# Altium PCB A3v4.PcbDoc
Units mm, origin at the board's own origin, x right, y up, seen from the top; angles counter-clockwise.
Board outline 82 x 77 mm, 2 copper layers (Top Layer, Bottom Layer); 17 components, 42 nets, 112 pads, 0 vias.
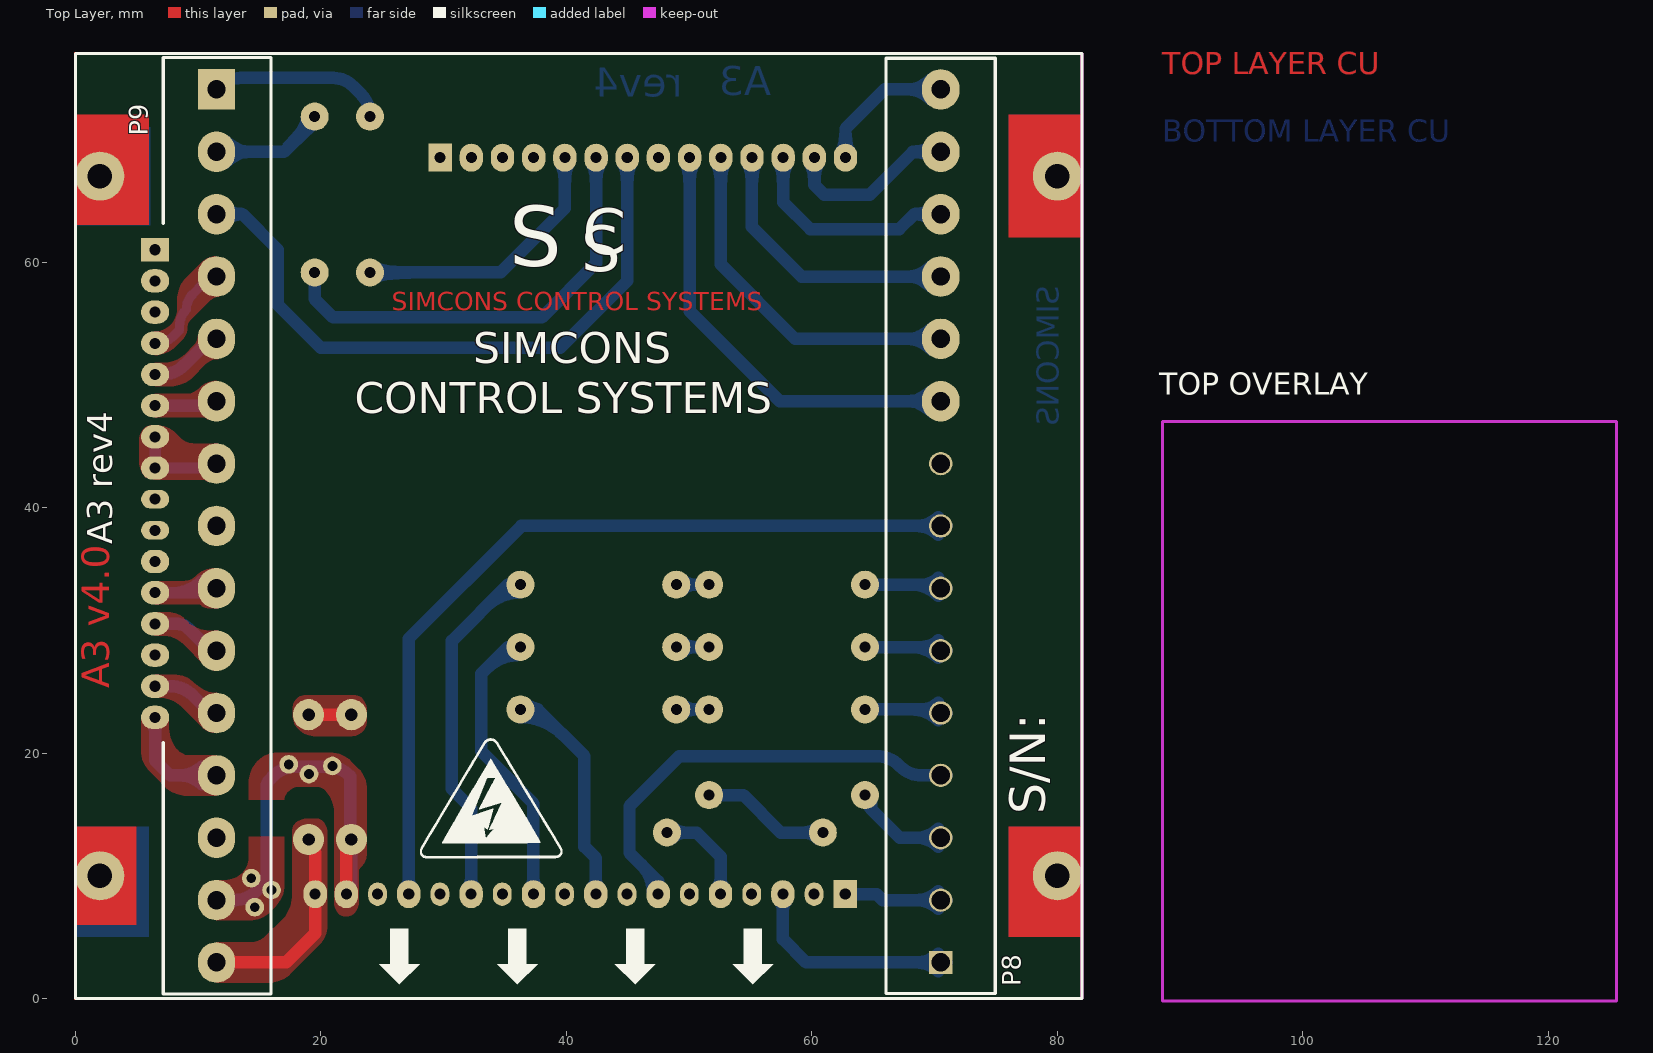
[diagram p0: Top Layer view]
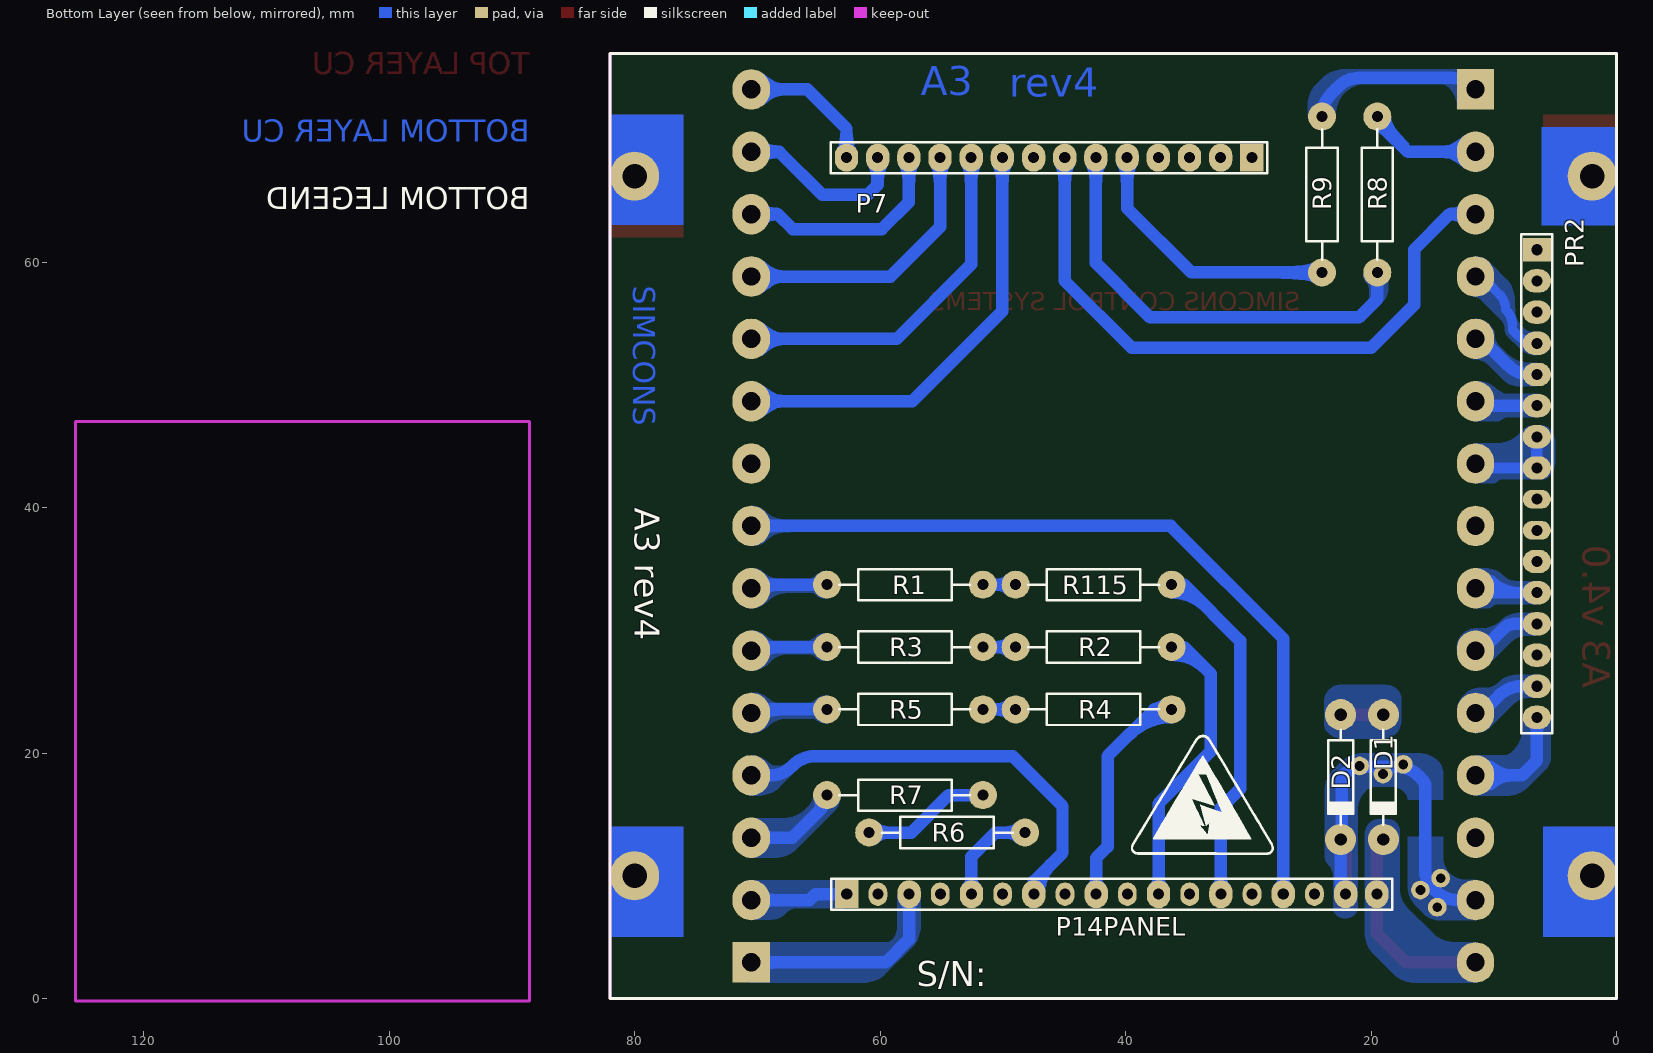
[diagram p1: Bottom Layer view, seen from below]

## Layer stack, top to bottom
Top Solder: solder mask 0.0102, Solder Resist, Dk 3.5
Top Layer: signal copper 0.0356
Dielectric1: dielectric 0.32, FR-4, Dk 4.8
Bottom Layer: signal copper 0.0356
Bottom Solder: solder mask 0.0102, Solder Resist, Dk 3.5

## Board outline
0,0 0,77 82,77 82,0

## Design rules (kind name [scope] priority, off if disabled: settings)
Clearance AC [(InNet('R') OR InNet('Y') OR InNet('B') OR InNet('N') OR InNet('DGB') OR InNet('DGN') OR InNet('DGR') OR InNet('DGY'))] p1: gap=0.635 ignorepadtopadclearanceinfootprint=FALSE except(0: Arc-Hole Track-Hole SMDPad-Hole THPad-Hole Via-Hole Fill-Hole Poly-Hole Region-Hole Text-Hole)
Clearance [All] p2: gap=0.457 ignorepadtopadclearanceinfootprint=FALSE except(0: Arc-Hole Track-Hole SMDPad-Hole THPad-Hole Via-Hole Fill-Hole Poly-Hole Region-Hole Text-Hole)
ComponentClearance [All] p1 off: gap=0.254 collisioncheckmode=3 verticalgap=0.254 showdistances=FALSE
Height [All] p1 off: minheight=0 maxheight=25.4 prefheight=12.7
PolygonConnect [All] p1: connectstyle=Direct reliefconductorwidth=0.254 reliefentries=4 polygonreliefangle="90 Angle" airgapwidth=0.254
RoutingVias [All] p1: holewidth=0.711 width=1.524 viastyle="Through Hole" minholewidth=0.711 minwidth=1.27 maxholewidth=2 maxwidth=3.048
SilkToSolderMaskClearance SilkscreenOverComponentPads [IsPad] p1: minsilkscreentomaskgap=0.254 clearancetoexposedcopper=TRUE
SolderMaskExpansion [All] p1: expansion=0.102
Width [All] p1: maxlimit=1.27 minlimit=0.61 preferedwidth=0.762
27 further rules are at their usual default settings.

## Classes and differential pairs
component class PANEL_A3_v4: D1 P7 P8 P9 P14PANEL PR2 R1 R2 R3 R4 R5 R6 R7 R9 R115

## Components (designator, comment, footprint, x,y, rotation, side; value= is the part's Value field where it differs from the comment)
D1 "P6KE44CA" DIODE1A 19.004,18.042 r270 bottom
D2 "P6KE44CA" DIODE1A 22.484,18.042 r270 bottom
P7 "Header 14" HDR1X14_BURGE_M 29.72,68.5 r0 bottom locked
P8 "XY2500 7PIN+8PIN MALE ST, FEMALE R/A" XY2500_15PIN_M_ST#1 70.5,38.5 r90 top locked
P9 "XY2500 7PIN+8PIN MALE ST, FEMALE R/A" XY2500_15PIN_M_ST#2 11.5,38.5 r270 top locked
P14PANEL "Header 18" HDR1X18_BURGE_M 62.72,8.5 r180 bottom locked
PR2 "Header 16" HDR1X16_BURGE_F 6.5,61 r270 bottom
R1 "MFR 1M .5W" AXIAL-0.5 57.98,33.715 r0 bottom value=100K
R2 "MFR 1M .5W" AXIAL-0.5 42.605,28.635 r0 bottom value=100K
R3 "MFR 1M .5W" AXIAL-0.5 57.98,28.635 r0 bottom value=100K
R4 "MFR 1M .5W" AXIAL-0.5 42.605,23.555 r0 bottom value=100K
R5 "MFR 1M .5W" AXIAL-0.5 57.98,23.555 r0 bottom value=100K
R6 "MFR 1M .5W" AXIAL-0.5 54.543,13.522 r0 bottom value=100K
R7 "MFR 1M .5W" AXIAL-0.5 57.98,16.57 r0 bottom value=100K
R8 "MFR 1M .5W" AXIAL-0.5 19.5,65.5 r90 bottom value=100K
R9 "MFR 1M .5W" AXIAL-0.5 24,65.5 r90 bottom value=100K
R115 "MFR 1M .5W" AXIAL-0.5 42.605,33.715 r0 bottom value=100K

## Footprints (in the part's own frame and the unit in brackets; to place one, negate y for a bottom-side part, rotate by r counter-clockwise, add the part's x,y. Pads: shape width x height; smd on the part's side, far side on the other; paste and mask are expansions set on the pad)
AXIAL-0.5 [mil] "Axial Device, Thru-Hole; 2 Leads; 0.5 in Pin Spacing"
  round 90 hole 35.43: 1(-250,0) 2(250,0)
  silkscreen extent -210,-50 210,50, body extent -270,-51 270,51, height 106
DIODE1A [mm] "DIODE 1 AMPERE"
  round 2.54 hole 1: 1(-5.08,0) 2(5.08,0)
  silkscreen extent -3.87,-1.02 3.87,1.02, body extent -5.51,-1.36 5.51,1.36, height 2.72
HDR1X14_BURGE_M [mm] "Connector; Header; 14 Position"
  rect 1.905x2.286 hole 0.9: 1(0,0)
  oval 1.905x2.286 hole 0.9: 2(2.54,0) 3(5.08,0) 4(7.62,0) 5(10.16,0) 6(12.7,0) 7(15.24,0) 8(17.78,0) 9(20.32,0) 10(22.86,0) 11(25.4,0) 12(27.94,0) 13(30.48,0) 14(33.02,0)
  silkscreen extent -1.27,-1.27 34.29,1.27, body extent -1.27,-10.04 34.29,0.32, height 2.56
HDR1X16_BURGE_F [mil] "Connector; Header; 16 Position"
  rect 75x90 hole 35.43: 1(0,0)
  oval 75x90 hole 35.43: 2(100,0) 3(200,0) 4(300,0) 5(400,0) 6(500,0) 7(600,0) 8(700,0) 11(1000,0) 12(1100,0) 13(1200,0) 14(1300,0) 15(1400,0) 16(1500,0)
  oval 60x90 hole 35.43: 9(800,0) 10(900,0)
  silkscreen extent -50,-50 1550,50, body extent -50,-50 1550,50, height 237
HDR1X18_BURGE_M [mm] "Connector; Header; 18 Position"
  rect 1.905x2.286 hole 0.9: 1(0,0)
  oval 1.524x1.905 hole 0.9: 2(2.54,0) 4(7.62,0) 6(12.7,0) 8(17.78,0) 10(22.86,0) 12(27.94,0) 14(33.02,0) 16(38.1,0)
  oval 1.905x2.286 hole 0.9: 3(5.08,0) 5(10.16,0) 7(15.24,0) 9(20.32,0) 11(25.4,0) 13(30.48,0) 15(35.56,0) 17(40.64,0) 18(43.18,0)
  silkscreen extent -1.27,-1.27 44.45,1.27, body extent -1.27,-10.04 44.45,0.32, height 2.54
XY2500_15PIN_M_ST#1 [mm]
  rect 1.905x1.905 / inner rect 3.302x3.048 / far side rect 3.302x3.048 hole 1.5: 1(-35.56,0)
  round 1.905 / inner oval 3.302x3.048 / far side oval 3.302x3.048 hole 1.5: 2(-30.48,0) 3(-25.4,0) 4(-20.32,0) 5(-15.24,0) 6(-10.16,0) 7(-5.08,0) 8(0,0) 9(5.08,0)
  oval 3.302x3.048 hole 1.5: 10(10.16,0) 11(15.24,0) 12(20.32,0) 13(25.4,0) 14(30.48,0) 15(35.56,0)
  silkscreen extent -38.1,-4.45 38.1,4.45, body extent -38.06,-4.24 38.06,4.24, height 12.08
XY2500_15PIN_M_ST#2 [mm]
  rect 3.302x3.048 hole 1.5: 1(-35.56,0)
  oval 3.302x3.048 hole 1.5: 2(-30.48,0) 3(-25.4,0) 4(-20.32,0) 5(-15.24,0) 6(-10.16,0) 7(-5.08,0) 8(0,0) 9(5.08,0) 10(10.16,0) 11(15.24,0) 12(20.32,0) 13(25.4,0) 14(30.48,0) 15(35.56,0)
  silkscreen extent -38.17,-4.34 38.14,4.45, body extent -38.06,-4.24 38.06,4.24, height 12.08

## Part data
D1 D2: library part "Diode 1N5408", "3 Amp Medium Power Silicon Rectifier Diode", ComponentLink1Description="Manufacturer Link", ComponentLink1URL=http://www.irf.com/, DatasheetVersion=Aug-1984, LatestRevisionDate=17-Jul-2002, LatestRevisionNote="Re-released for DXP Platform.", PackageDescription="Diode, Axial; Body 9.5 x 5.3 mm (LxDia. max), Lead Dia. 1.32 mm (max)", PackageReference=DO-201AD, Published=8-Jun-2000, Publisher="Altium Limited"
P7: "Header, 14-Pin", LatestRevisionDate=17-Jul-2002, LatestRevisionNote="Re-released for DXP Platform.", Publisher="Altium Limited"
P8 P9: library part "Header 15", "Header, 15-Pin", LatestRevisionDate=17-Jul-2002, LatestRevisionNote="Re-released for DXP Platform.", Publisher="Altium Limited"
P14PANEL: "Header, 18-Pin", LatestRevisionDate=17-Jul-2002, LatestRevisionNote="Re-released for DXP Platform.", Publisher="Altium Limited"
PR2: "Header, 16-Pin", LatestRevisionDate=17-Jul-2002, LatestRevisionNote="Re-released for DXP Platform.", Publisher="Altium Limited"
R1 R2 R3 R4 R5 R6 R7 R8 R9 R115: library part "Res Semi", "Semiconductor Resistor", LatestRevisionDate=17-Jul-2002, LatestRevisionNote="Re-released for DXP Platform.", PackageDescription="Axial Device, Thru-Hole; 2 Leads; 0.5 in Pin Spacing", PackageReference=AXIAL-0.5, Published=8-Jun-2000, Publisher="Altium Limited"

## Free pads (board coordinates)
  round 4 hole 2: 0(2,10) 1(80,10) 2(80,67) 3(2,67)
  round 1.524 hole 0.8: 4(14.334,9.804) 5(14.613,7.442) 6(15.985,8.839) 7(17.382,19.075) 8(19.033,18.288) 9(20.938,18.948)

## Nets (pads, with @x,y where several pads share a name; then routed paths per layer and width w, separated by ;. In a path a pad name is that pad's centre, name@x,y a point inside that pad or via, vN(x,y) a via of type N, cw(c..) or ccw(c..) an arc to the next point about the centre after c; other vN are vias at no path point)
B: P8.5 R5.2 | length 10.1
  Bottom Layer w1.016: R5.2@64.83,23.555 70.705,23.555 P8.5@71,23.26 ; 68.142,23.555 cw(c68.142,20.529) P8.5@70.282,22.669 ; 68.953,23.555 ccw(c68.953,25.434) P8.5@70.282,24.105
B_M: P14PANEL.9 R4.1 | length 28
  Bottom Layer w1.016: R4.1@36.255,22.92 cw(c36.255,18.014) 39.724,21.483 ; R4.1 37.652,23.555 ; R4.1@36.255,23.936 cw(c36.255,21.483) 37.989,23.218 ; R4.1@36.733,23.137 cw(c37.652,22.336) 37.652,23.555 ; R4.1@36.733,23.973 ccw(c37.652,24.774) 37.652,23.555 ; P14PANEL.9@42.086,9.005 ccw(c41.327,9.764) 42.4,9.764 ccw(c43.473,9.764) P14PANEL.9@42.714,9.005 ; P14PANEL.9 42.4,11.441 41.462,12.379 41.462,19.745 37.652,23.555
BAT+: D2.2 P9.14 P14PANEL.17 pad.4 pad.5 pad.6 pad.7 pad.8 pad.9 | length 34.3
  Top Layer w1.016: P14PANEL.17 22.08,11.987 cw(c23.459,11.987) D2.2
  Bottom Layer w1.016: P9.14 12.968,8.02 ccw(c12.968,10.56) 14.764,8.764 14.964,8.964 ccw(c13.427,10.5) 15.6,10.5 15.6,17.317 cw(c16.283,17.317) 15.8,17.8 16.156,18.156 cw(c17.952,16.36) 17.952,18.9 20.548,18.9 cw(c20.548,16.36) 22.344,18.156 22.4,18.1 22.4,13.165 ccw(c22.686,13.165) D2.2 22.484,9.475 cw(c21.105,9.475) P14PANEL.17@22.081,8.501
BTS+: P9.1 R9.2 | length 14.5
  Bottom Layer w1.016: P9.1 11.696,74.256 cw(c13.492,72.46) 13.492,75 21,75 cw(c21,72.712) 22.618,74.33 23.256,73.692 cw(c21.46,71.896) 24,71.896 R9.2
BTS+_R: P7.5 R9.1 | length 22.2
  Bottom Layer w1.016: R9.1 34.65,59.15 39.88,64.38 P7.5
BTS-: P9.2 R8.2 | length 9.2
  Bottom Layer w1.016: P9.2 16.98,68.98 19,71 R8.2@19,71.85
BTS-_R: P7.6 R8.1 | length 35.6
  Bottom Layer w1.016: R8.1@19.5,58.65 19.5,57 21,55.5 38,55.5 42.42,59.92 P7.6
CONT_S_IN: P7.7 P9.3 | length 52.9
  Bottom Layer w1.016: P9.3 13.6,63.9 16.5,61 16.5,56.5 20,53 39.5,53 44.96,58.46 P7.7
DGB: P8.1 P14PANEL.3 | length 23.3
  Bottom Layer w1.016: P14PANEL.3@57.326,7.995 cw(c56.567,7.236) 57.64,7.236 cw(c58.713,7.236) P14PANEL.3@57.954,7.995 ; P14PANEL.3 57.64,4.837 59.537,2.94 P8.1 P8.1@71,2.94 ; P8.1@70.282,2.222 ccw(c68.547,0.487) 68.547,2.94 ccw(c68.547,5.393) P8.1@70.282,3.658
DGN: P8.4 P14PANEL.7 | length 38.6
  Bottom Layer w1.016: 46.123,10.893 cw(c43.921,8.691) P14PANEL.7@47.035,8.691 ; P14PANEL.7 47.48,9.536 45.145,11.871 45.145,15.681 49.209,19.745 65.291,19.745 cw(c65.291,17.205) 67.088,19.001 67.165,18.924 ccw(c68.961,20.72) 68.961,18.18 P8.4 P8.4@71,18.18
DGR: P8.3 R7.2 | length 13.6
  Bottom Layer w1.016: R7.2@64.449,16.57 ccw(c66.289,16.57) 64.988,15.269 ; R7.2@64.83,16.57 64.83,15.427 67.157,13.1 P8.3 P8.3@71,13.1 ; P8.3@70.282,12.382 ccw(c68.547,10.647) 68.547,13.1 ccw(c68.547,15.553) P8.3@70.282,13.818
DGR_M: P14PANEL.5 R6.1 | length 12.3
  Bottom Layer w1.016: R6.1 50.606,13.522 52.56,11.568 P14PANEL.5 ; R6.1@48.642,13.073 cw(c49.726,11.989) 49.726,13.522 cw(c49.726,15.055) R6.1@48.642,13.971 ; P14PANEL.5@52.246,9.005 ccw(c51.487,9.764) 52.56,9.764 ccw(c53.633,9.764) P14PANEL.5@52.874,9.005
DGY: P8.2 P14PANEL.1 | length 14
  Bottom Layer w1.016: P14PANEL.1 65.28,8.5 65.76,8.02 P8.2 P8.2@71,8.02 ; P14PANEL.1@63.034,8.186 cw(c63.793,7.427) 63.793,8.5 cw(c63.793,9.573) P14PANEL.1@63.034,8.814 ; P8.2@70.282,7.302 ccw(c68.547,5.567) 68.547,8.02 ccw(c68.547,10.473) P8.2@70.282,8.738
DIGITALIN: P9.7 PR2.7 PR2.8 | length 9.5
  Bottom Layer w0.914: PR2.7@6.15,45.41 cw(c5.304,44.564) 6.5,44.564 cw(c7.696,44.564) PR2.7@6.85,45.41 ; PR2.7 PR2.8 10.631,43.22 ccw(c10.631,44.449) 10.64,43.22 ccw(c10.631,44.449) P9.7
EMSTP: P7.11 P8.12 | length 23.2
  Bottom Layer w1.016: P7.11 55.12,62.856 59.156,58.82 P8.12 P8.12@71,58.82
FLGIN: P7.4
FLIN: P7.8 | length 0.3
  Bottom Layer w1.016: P7.8@47.304,68.304 P7.8
GCONTACTIN: P9.10 PR2.13 | length 5.9
  Bottom Layer w1.016: PR2.13 8.335,30.52 cw(c8.335,29.349) 9.163,30.177 11,28.34 P9.10
GCONTACTOUT: P9.9 PR2.12 | length 9.6
  Bottom Layer w0.914: PR2.12 10.64,33.06 ccw(c10.64,34.267) 11.494,33.414 P9.9 ; PR2.12@7.041,32.71 cw(c7.886,31.864) 7.886,33.06 cw(c7.886,34.256) PR2.12@7.041,33.41 ; 7.862,33.06 ccw(c7.862,36.431) P9.9@10.246,34.047
GND: D1.2 P9.15 P14PANEL.18 | length 16.8
  Top Layer w1.016: P9.15 17.172,2.94 19.54,5.308 P14PANEL.18 19.54,11.668 ccw(c17.71,11.668) D1.2
LLOP: P7.12 P8.13 | length 18.4
  Bottom Layer w1.016: P7.12 57.66,64.888 59.877,62.671 67.116,62.671 68.345,63.9 P8.13 P8.13@71,63.9
LOPIN: P7.9 P8.10 | length 36.5
  Bottom Layer w1.016: P7.9 50.04,55.998 57.378,48.66 P8.10 P8.10@71,48.66
MCONTACTIN: P9.12 PR2.16 | length 14
  Bottom Layer w1.016: PR2.16@6.186,22.586 cw(c5.427,21.827) 6.5,21.827 cw(c7.573,21.827) PR2.16@6.814,22.586 ; PR2.16 6.5,19.401 7.721,18.18 P9.12@11,18.18 ; P9.12@10.282,17.462 ccw(c8.547,15.727) 8.547,18.18 ccw(c8.547,20.633) P9.12@10.282,18.898
MCONTACTOUT: P9.11 PR2.15 | length 5.8
  Bottom Layer w1.016: PR2.15 7.768,25.44 cw(c7.768,22.9) 9.564,24.696 11,23.26 P9.11
N: P8.8 P14PANEL.15 | length 74
  Bottom Layer w1.016: P14PANEL.15@26.846,9.005 ccw(c26.087,9.764) 27.16,9.764 ccw(c28.233,9.764) P14PANEL.15@27.474,9.005 ; P14PANEL.15 27.16,29.319 36.341,38.5 P8.8 P8.8@71,38.5 ; P8.8@70.282,37.782 ccw(c68.547,36.047) 68.547,38.5 ccw(c68.547,40.953) P8.8@70.282,39.218
NetD1_1: D1.1 D2.1 | length 3.5
  Top Layer w1.016: D1.1 D2.1
NetR1_1: R1.1 R115.2 | length 8
  Bottom Layer w1.016: R115.2 R1.1 R1.1@52.13,33.715 ; R115.2@49.404,33.266 cw(c50.488,32.182) 50.488,33.715 cw(c50.488,35.248) R115.2@49.404,34.164 ; R1.1@51.681,33.266 ccw(c50.597,32.182) 50.597,33.715 ccw(c50.597,35.248) R1.1@51.681,34.164
NetR2_2: R2.2 R3.1 | length 8
  Bottom Layer w1.016: R2.2 R3.1 R3.1@52.13,28.635 ; R2.2@49.404,28.186 cw(c50.488,27.102) 50.488,28.635 cw(c50.488,30.168) R2.2@49.404,29.084 ; R3.1@51.681,28.186 ccw(c50.597,27.102) 50.597,28.635 ccw(c50.597,30.168) R3.1@51.681,29.084
NetR4_2: R4.2 R5.1 | length 8
  Bottom Layer w1.016: R4.2 R5.1 R5.1@52.13,23.555 ; R4.2@49.404,23.106 cw(c50.488,22.022) 50.488,23.555 cw(c50.488,25.088) R4.2@49.404,24.004 ; R5.1@51.681,23.106 ccw(c50.597,22.022) 50.597,23.555 ccw(c50.597,25.088) R5.1@51.681,24.004
NetR6_2: R6.2 R7.1 | length 12.4
  Bottom Layer w1.016: R7.1@52.13,16.57 54.416,16.57 57.464,13.522 R6.2 ; R6.2@60.444,13.073 ccw(c59.36,11.989) 59.36,13.522 ccw(c59.36,15.055) R6.2@60.444,13.971
OILTEMP: P7.14 P8.15 | length 12
  Bottom Layer w1.016: P7.14 62.74,70.868 65.932,74.06 P8.15 P8.15@71,74.06
R: P8.7 R1.2 | length 10.1
  Bottom Layer w1.016: R1.2@64.83,33.715 70.705,33.715 P8.7@71,33.42 ; 68.142,33.715 cw(c68.142,30.689) P8.7@70.282,32.829 ; 68.953,33.715 ccw(c68.953,35.594) P8.7@70.282,34.265
R1IN: P7.3
R_M: P14PANEL.13 R115.1 | length 33.6
  Bottom Layer w1.016: P14PANEL.13@31.926,9.005 ccw(c31.167,9.764) 32.24,9.764 ccw(c33.313,9.764) P14PANEL.13@32.554,9.005 ; P14PANEL.13 32.24,15.505 30.667,17.078 30.667,29.143 35.239,33.715 R115.1 ; 33.437,31.913 cw(c36.255,29.094) R115.1@36.255,33.08
RL_HOOTER: P9.4 PR2.4 | length 8
  Bottom Layer w0.762: PR2.4 ccw(c6.5,55.567) 8.046,54.02 ; 8.047,54.021 8.481,54.455 8.481,54.779 cw(c10.397,54.779) 9.042,56.134 cw(c10.801,56.134) 9.557,57.377 10.342,58.162 ccw(c10.342,59.369) 11.195,58.515 P9.4
RL_START: P9.6 PR2.6 | length 4.6
  Bottom Layer w1.016: PR2.6 10.131,48.3 ccw(c10.131,49.529) P9.6@11,48.66
RL_STOP: P9.5 PR2.5 | length 6.1
  Bottom Layer w1.016: PR2.5 7.048,50.84 ccw(c7.048,53.38) 8.844,51.584 11,53.74 P9.5
TIOUT: P7.2
WATERTEMP: P7.13 P8.14 | length 14.8
  Bottom Layer w1.016: P7.13 60.2,66.285 61.02,65.465 64.703,65.465 68.218,68.98 P8.14 P8.14@71,68.98
WTANIN: P7.10 P8.11 | length 29.6
  Bottom Layer w1.016: P7.10 52.58,59.808 58.648,53.74 P8.11 P8.11@71,53.74
Y: P8.6 R3.2 | length 10.1
  Bottom Layer w1.016: R3.2@64.83,28.635 70.705,28.635 P8.6@71,28.34 ; 68.142,28.635 cw(c68.142,25.609) P8.6@70.282,27.749 ; 68.953,28.635 ccw(c68.953,30.514) P8.6@70.282,29.185
Y_M: P14PANEL.11 R2.1 | length 28.6
  Bottom Layer w1.016: 33.437,26.833 cw(c36.255,24.014) R2.1@36.255,28 ; R2.1 35.239,28.635 33.08,26.476 33.08,20.126 37.32,15.886 P14PANEL.11 ; P14PANEL.11@37.006,9.005 ccw(c36.247,9.764) 37.32,9.764 ccw(c38.393,9.764) P14PANEL.11@37.634,9.005
pads on no net: P7.1 P8.9 P9.8 P9.13 P14PANEL.2 P14PANEL.4 P14PANEL.6 P14PANEL.8 P14PANEL.10 P14PANEL.12 P14PANEL.14 P14PANEL.16 PR2.1 PR2.2 PR2.3 PR2.9 PR2.10 PR2.11 PR2.14
copper on no net: | length 636
  Top Layer w0.203: 0,0 0,77 82,77 82,0 0,0
  Bottom Layer w0.203: 0,0 0,77 82,77 82,0 0,0

## Polygon pours and split planes (outlines as drawn)
BTS-_R on Bottom Layer "NONET_L-01_P-001" (solid, pour order 142): 19.304,56.515 19.031,56.788 cw(c20.029,57.785) 18.618,57.785 18.618,58.255 ccw(c18.098,58.255) 18.466,58.623 18.466,58.962 cw(c18.813,58.962) 18.567,59.207 ccw(c18.874,59.514) 18.874,59.08 20.625,59.08 20.625,58.881 cw(c19.758,58.881) 20.371,58.268 ccw(c20.923,57.716) 20.142,57.716 20.142,57.228 ccw(c20.576,57.228) 20.269,56.921 ccw(c20.269,56.626) 20.061,56.835 19.863,56.637
BTS+ on Bottom Layer "NONET_L-01_P-001" (solid, pour order 140): 11.43,75.692 22.214,75.692 cw(c22.214,73.152) 24.01,74.948 24.46,74.498 cw(c22.805,72.843) 25.146,72.843 25.146,71.78 22.947,71.78 cw(c22.947,71.867) 22.885,71.806 22.885,71.998 ccw(c20.345,71.998) 22.141,73.794 ccw(c20.442,72.095) 20.442,74.498 14.447,74.498 ccw(c14.447,73.284) 13.589,74.143 ccw(c14.938,72.794) 13.03,72.794 13.03,72.517 12.192,72.517
BAT+ on Bottom Layer "NONET_L-01_P-001" (solid, pour order 72): 11.489,9.677 12.237,9.677 ccw(c12.237,11.672) 13.648,10.262 ccw(c12.483,11.427) 14.13,11.427 14.13,13.183 17.026,13.183 17.026,9.256 cw(c14.486,9.256) 16.282,7.46 15.68,6.858 cw(c14.515,8.023) 14.515,6.375 11.387,6.375
BAT+ on Bottom Layer "NONET_L-01_P-001" (solid, pour order 76): 14.13,16.182 14.133,16.185 cw(c17.871,16.185) 17.273,16.783 17.305,16.815 cw(c18.409,15.711) 18.409,17.272 19.571,17.272 cw(c19.571,16.058) 20.43,16.916 20.448,16.898 cw(c18.897,15.348) 21.09,15.348 21.09,7.482 ccw(c22.044,7.482) 21.369,6.807 ccw(c21.983,7.42) 21.983,6.553 22.208,6.553 ccw(c22.208,7.473) 22.858,6.823 22.893,6.858 ccw(c22.464,7.287) 23.071,7.287 23.071,9.89 cw(c24.459,9.89) 23.478,10.871 ccw(c22.742,11.607) 23.782,11.607 23.782,16.88 ccw(c21.242,16.88) 23.038,18.676 22.469,19.246 ccw(c20.673,17.45) 20.673,19.99 16.095,19.99 ccw(c16.095,17.822) 14.562,19.355 ccw(c15.605,18.312) 14.13,18.312
NetD1_1 on Bottom Layer "NONET_L-01_P-001" (solid, pour order 78): 22.327,21.184 ccw(c22.327,22.918) 23.554,21.692 ccw(c22.879,22.366) 23.833,22.366 23.833,24.154 ccw(c22.359,24.154) 23.401,25.197 ccw(c22.482,24.277) 22.482,25.578 18.917,25.578 ccw(c18.917,24.017) 17.813,25.121 ccw(c18.427,24.507) 17.559,24.507 17.559,22.632 ccw(c19.034,22.632) 17.991,21.59 ccw(c18.972,22.571) 18.972,21.184
GND on Bottom Layer "NONET_L-01_P-001" (solid, pour order 80): 11.387,1.27 16.406,1.27 ccw(c16.406,3.81) 18.202,2.014 19.762,3.574 ccw(c17.966,5.37) 20.506,5.37 20.506,13.406 ccw(c19.205,13.406) 20.125,14.326 ccw(c19.45,13.651) 19.45,14.605 18.543,14.605 ccw(c18.543,13.825) 17.991,14.376 ccw(c18.727,13.641) 17.686,13.641 17.686,8.924 cw(c15.518,8.924) 17.051,7.391 15.001,5.341 cw(c13.205,7.137) 13.205,4.597 11.489,4.597 11.015,4.124 cw(c10.625,4.514) 10.625,3.962
N on Bottom Layer "NONET_L-01_P-001" (solid, pour order 90): 70.518,40.132 70.382,40.132 ccw(c70.382,38.744) 69.401,39.726 cw(c67.684,41.443) 67.684,39.014 67.343,39.014 67.343,37.973 67.726,37.973 cw(c67.726,35.892) 69.198,37.363 ccw(c70.363,38.529) 70.363,36.881 70.645,36.881
R on Bottom Layer "NONET_L-01_P-001" (solid, pour order 92): 64.295,34.849 64.341,34.849 cw(c64.341,33.548) 65.261,34.468 ccw(c65.874,35.081) 65.874,34.214 68.24,34.214 ccw(c68.24,36.035) 69.528,34.747 cw(c70.264,34.011) 70.264,35.052 70.569,35.052 cw(c70.508,34.991) 70.595,34.991 70.595,31.801 70.378,31.801 cw(c70.378,33.362) 69.274,32.258 69.205,32.327 ccw(c67.47,30.593) 67.47,33.045 65.603,33.045 ccw(c65.603,32.525) 65.235,32.893 cw(c64.499,33.629) 64.499,32.588 64.372,32.588
Y on Bottom Layer "NONET_L-01_P-001" (solid, pour order 94): 70.544,29.997 70.449,29.997 ccw(c70.449,28.263) 69.223,29.489 cw(c68.426,30.287) 68.426,29.159 66.058,29.159 cw(c66.058,30.287) 65.261,29.489 ccw(c64.586,28.815) 64.586,29.769 64.27,29.769 64.27,27.57 ccw(c64.357,27.57) 64.295,27.508 64.668,27.508 ccw(c64.668,28.202) 65.159,27.711 cw(c65.956,26.914) 65.956,28.042 67.436,28.042 cw(c67.436,25.874) 68.969,27.407 69.07,27.306 ccw(c70.544,28.78) 70.544,26.695
B on Bottom Layer "NONET_L-01_P-001" (solid, pour order 96): 64.346,24.689 64.417,24.689 cw(c64.417,23.388) 65.337,24.308 ccw(c65.889,24.86) 65.889,24.079 68.083,24.079 ccw(c68.083,25.727) 69.248,24.562 cw(c70.046,23.765) 70.046,24.892 70.62,24.892 70.62,21.677 ccw(c70.707,21.677) 70.645,21.615 70.46,21.615 cw(c70.46,23.437) 69.172,22.149 ccw(c67.578,20.554) 67.578,22.809 65.48,22.809 ccw(c65.48,22.462) 65.235,22.708 cw(c64.561,23.382) 64.561,22.428 64.245,22.428
DGN on Bottom Layer "NONET_L-01_P-001" (solid, pour order 98): 70.518,19.812 70.47,19.812 ccw(c70.47,17.904) 69.121,19.253 cw(c68.447,19.928) 68.447,18.974 68.309,18.974 cw(c68.309,20.139) 67.485,19.315 67.47,19.329 ccw(c66.612,18.471) 66.612,19.685 66.429,19.685 66.429,19.477 ccw(c67.643,19.477) 66.785,18.618 68.123,17.279 ccw(c69.92,19.075) 69.92,16.535 70.645,16.535
DGR on Bottom Layer "NONET_L-01_P-001" (solid, pour order 100): 63.203,16.586 ccw(c65.165,16.586) 63.778,15.199 66.777,12.199 ccw(c68.573,13.995) 68.573,11.455 70.671,11.455 70.671,14.216 ccw(c69.977,14.216) 70.468,14.707 67.816,14.707 cw(c67.816,17.135) 66.099,15.418 65.808,15.708 cw(c66.762,16.662) 65.413,16.662
DGY on Bottom Layer "NONET_L-01_P-001" (solid, pour order 102): 62.848,9.627 70.513,9.627 cw(c70.513,8.326) 71.433,9.246 71.237,9.05 ccw(c73.033,7.254) 70.493,7.254 70.493,6.401 68.951,6.401 cw(c68.951,8.135) 67.724,6.909 ccw(c66.621,5.805) 66.621,7.366 62.975,7.366
DGB on Bottom Layer "NONET_L-01_P-001" (solid, pour order 104): 56.701,8.534 56.701,5.929 ccw(c59.241,5.929) 57.445,4.133 59.538,2.039 ccw(c61.334,3.835) 61.334,1.295 70.671,1.295 70.671,3.897 ccw(c69.717,3.897) 70.391,4.572 59.528,4.572 cw(c59.528,5.266) 59.038,4.775 cw(c60.08,5.818) 58.606,5.818 58.606,8.484
MCONTACTIN on Bottom Layer "NONET_L-01_P-001" (solid, pour order 106): 5.359,22.987 5.359,19.65 ccw(c6.747,19.65) 5.766,18.669 7.181,17.254 ccw(c8.977,19.05) 8.977,16.51 11.557,16.51 11.557,19.812 9.209,19.812 cw(c9.209,20.766) 8.534,20.091 8.389,20.236 cw(c10.185,22.033) 7.645,22.033 7.645,22.911
MCONTACTOUT on Bottom Layer "NONET_L-01_P-001" (solid, pour order 108): 6.452,24.486 7.217,24.486 cw(c7.217,22.838) 8.382,24.003 10.249,22.136 ccw(c11.506,23.394) 11.506,21.615 cw(c12.242,21.615) 11.722,22.136 13.005,23.419 ccw(c11.165,23.419) 12.466,24.72 12.39,24.796 ccw(c11.176,23.581) 11.176,25.298 10.684,25.298 cw(c10.684,26.686) 9.703,25.705 ccw(c8.047,24.049) 8.047,26.391 6.35,26.391
GCONTACTIN on Bottom Layer "NONET_L-01_P-001" (solid, pour order 110): 6.579,29.566 7.262,29.566 cw(c7.262,27.658) 8.611,29.007 10.156,27.462 ccw(c11.76,29.066) 11.76,26.797 12.797,27.834 ccw(c12.233,28.397) 13.03,28.397 13.03,28.563 ccw(c11.469,28.563) 12.573,29.667 12.478,29.762 ccw(c11.481,28.765) 11.481,30.175 10.931,30.175 cw(c10.931,32.343) 9.398,30.81 ccw(c7.865,29.277) 7.865,31.445 6.502,31.445
GCONTACTOUT on Bottom Layer "NONET_L-01_P-001" (solid, pour order 112): 6.477,32.106 9.741,32.106 cw(c9.741,31.585) 10.109,31.953 ccw(c10.538,32.382) 10.538,31.775 11.506,31.775 11.506,35.052 10.645,35.052 ccw(c10.645,33.144) 9.296,34.493 cw(c8.131,35.658) 8.131,34.011 6.426,34.011
DIGITALIN on Bottom Layer "NONET_L-01_P-001" (solid, pour order 114): 6.7,46.711 cw(c6.7,45.41) 7.62,46.33 7.968,45.981 ccw(c9.764,47.777) 9.764,45.237 11.582,45.237 11.582,42.022 cw(c11.496,42.022) 11.557,41.961 10.096,41.961 cw(c10.096,42.481) 9.728,42.113 ccw(c9.299,41.684) 9.299,42.291 6.1,42.291 cw(c6.1,43.158) 5.486,42.545 cw(c6.652,43.71) 5.004,43.71 5.004,45.194 cw(c6.825,45.194) 5.537,46.482 cw(c6.089,45.93) 6.089,46.711
RL_START on Bottom Layer "NONET_L-01_P-001" (solid, pour order 116): 6.426,47.346 8.964,47.346 cw(c8.964,46.912) 9.271,47.219 ccw(c9.762,47.709) 9.762,47.015 11.582,47.015 11.582,50.292 11.194,50.292 ccw(c11.194,48.471) 9.906,49.759 cw(c8.68,50.985) 8.68,49.251 6.375,49.251
RL_STOP on Bottom Layer "NONET_L-01_P-001" (solid, pour order 118): 6.477,49.886 8.04,49.886 ccw(c8.04,51.447) 9.144,50.343 10.322,51.521 cw(c11.709,50.133) 11.709,52.095 cw(c12.261,52.647) 11.481,52.647 11.481,55.372 ccw(c11.481,53.839) 10.397,54.923 10.236,54.762 ccw(c10.972,54.027) 9.931,54.027 9.931,54 cw(c8.889,54) 9.626,53.263 8.897,52.535 cw(c7.101,54.331) 7.101,51.791 6.477,51.791
RL_HOOTER on Bottom Layer "NONET_L-01_P-001" (solid, pour order 120): 6.477,52.426 6.612,52.426 ccw(c6.612,54.247) 7.899,52.959 8.867,53.927 ccw(c8.26,54.534) 9.119,54.534 cw(c10.222,54.534) 9.442,55.314 11.016,56.888 cw(c11.709,56.194) 11.709,57.175 cw(c12.507,57.175) 11.943,57.739 12.04,57.836 cw(c13.327,59.124) 11.506,59.124 11.506,60.452 ccw(c11.506,58.796) 10.335,59.967 9.784,59.416 ccw(c11.085,58.115) 9.246,58.115 cw(c8.08,58.115) 8.904,57.291 8.704,57.091 ccw(c9.788,56.007) 8.255,56.007 cw(c6.599,56.007) 7.77,54.836 7.518,54.585 cw(c6.905,55.198) 6.905,54.331 6.35,54.331
RL_HOOTER on Bottom Layer "NONET_L-01_P-001" (solid, pour order 122): 8.314,56.454 8.314,56.893 cw(c10.854,56.893) 9.058,58.689 10.135,59.766 10.699,59.202 ccw(c11.913,60.416) 11.913,58.699 cw(c11.422,58.699) 11.769,58.353 9.129,55.713 cw(c9.042,55.799) 9.042,55.677
GND on Top Layer "NONET_L-01_P-001" (solid, pour order 82): 11.514,1.295 15.745,1.295 ccw(c15.745,3.835) 17.541,2.039 19.871,4.369 ccw(c18.276,5.963) 20.531,5.963 20.531,13.497 ccw(c19.144,13.497) 20.125,14.478 ccw(c19.757,14.11) 19.757,14.63 18.773,14.63 ccw(c18.773,13.416) 17.915,14.275 ccw(c18.528,13.662) 17.661,13.662 17.661,8.291 cw(c15.121,8.291) 16.917,6.495 15.527,5.105 cw(c14.24,6.393) 14.24,4.572 11.489,4.572
BAT+ on Top Layer "NONET_L-01_P-001" (solid, pour order 84): 21.09,7.839 ccw(c22.478,7.839) 21.496,6.858 ccw(c21.864,7.226) 21.864,6.706 22.2,6.706 ccw(c22.2,7.399) 22.69,6.909 ccw(c21.77,7.829) 23.071,7.829 23.071,10.264 cw(c23.678,10.264) 23.249,10.693 ccw(c22.023,11.92) 23.757,11.92 23.757,16.982 ccw(c21.217,16.982) 23.013,18.778 22.487,19.304 ccw(c20.77,17.587) 20.77,20.015 16.425,20.015 ccw(c16.425,17.847) 14.892,19.38 14.874,19.362 ccw(c16.67,17.566) 14.13,17.566 14.13,16.18 17.026,16.18 cw(c17.884,16.18) 17.277,16.787 17.407,16.916 cw(c18.265,16.058) 18.265,17.272 19.618,17.272 cw(c19.618,16.231) 20.353,16.967 cw(c18.575,15.189) 21.09,15.189
BAT+ on Top Layer "NONET_L-01_P-001" (solid, pour order 86): 11.463,6.375 14.238,6.375 ccw(c14.238,8.63) 15.832,7.036 16.282,7.486 ccw(c14.486,9.282) 17.026,9.282 17.026,13.183 14.13,13.183 14.13,11.463 cw(c12.396,11.463) 13.622,10.236 cw(c12.212,11.647) 12.212,9.652 11.438,9.652
NetD1_1 on Top Layer "NONET_L-01_P-001" (solid, pour order 88): 22.42,21.361 ccw(c22.42,22.749) 23.401,21.768 ccw(c22.543,22.626) 23.757,22.626 23.757,23.443 ccw(c22.283,23.443) 23.325,24.486 ccw(c22.773,23.934) 22.773,24.714 18.681,24.714 ccw(c18.681,23.847) 18.067,24.46 ccw(c18.926,23.602) 17.712,23.602 17.712,23.063 ccw(c19.306,23.063) 18.179,21.936 ccw(c19.566,23.323) 19.566,21.361
MCONTACTIN on Top Layer "NONET_L-01_P-001" (solid, pour order 124): 7.62,22.911 7.62,22.007 ccw(c10.16,22.007) 8.364,20.211 8.382,20.193 ccw(c9.302,21.113) 9.302,19.812 11.506,19.812 11.506,16.535 9.079,16.535 cw(c9.079,19.075) 7.282,17.279 6.103,18.458 cw(c7.899,20.255) 5.359,20.255 5.359,22.936
MCONTACTOUT on Top Layer "NONET_L-01_P-001" (solid, pour order 126): 6.477,26.391 8.047,26.391 cw(c8.047,24.049) 9.703,25.705 9.779,25.628 ccw(c11.557,27.406) 11.557,24.892 11.557,21.886 cw(c11.21,21.886) 11.455,21.641 cw(c11.455,23.235) 10.328,22.108 8.669,23.767 ccw(c6.873,21.971) 6.873,24.511 6.426,24.511
GCONTACTIN on Top Layer "NONET_L-01_P-001" (solid, pour order 128): 6.452,29.566 7.097,29.566 cw(c7.097,27.137) 8.814,28.854 10.552,27.116 ccw(c11.506,28.07) 11.506,26.721 ccw(c11.261,26.966) 11.608,26.966 11.608,29.972 10.907,29.972 cw(c10.907,32.512) 9.111,30.716 8.915,30.912 ccw(c7.566,29.563) 7.566,31.471 6.502,31.471
GCONTACTOUT on Top Layer "NONET_L-01_P-001" (solid, pour order 130): 6.502,32.131 10.016,32.131 cw(c10.016,31.784) 10.262,32.029 ccw(c10.813,32.581) 10.813,31.801 11.582,31.801 cw(c11.766,31.985) 11.506,31.985 11.506,35.052 11.337,35.052 ccw(c11.337,32.884) 9.804,34.417 cw(c8.823,35.398) 8.823,34.011 6.401,34.011
DIGITALIN on Top Layer "NONET_L-01_P-001" (solid, pour order 132): 6.502,42.266 10.376,42.266 cw(c10.376,41.745) 10.744,42.113 10.915,42.284 ccw(c9.119,44.08) 11.659,44.08 11.659,45.212 9.735,45.212 cw(c9.735,46.946) 8.509,45.72 8.219,46.01 ccw(c6.528,44.319) 6.528,46.711 6.263,46.711 ccw(c6.263,45.757) 5.588,46.431 ccw(c6.508,45.511) 5.207,45.511 5.207,43.695 ccw(c6.941,43.695) 5.715,42.469
RL_START on Top Layer "NONET_L-01_P-001" (solid, pour order 134): 6.477,47.346 10.366,47.346 cw(c10.366,46.739) 10.795,47.168 11.321,47.694 ccw(c9.525,49.49) 12.065,49.49 12.065,49.657 ccw(c11.758,49.657) 11.975,49.874 11.532,50.317 11.473,50.317 ccw(c11.473,48.496) 10.185,49.784 cw(c8.898,51.072) 8.898,49.251 6.452,49.251
RL_STOP on Top Layer "NONET_L-01_P-001" (solid, pour order 136): 6.502,49.886 7.762,49.886 ccw(c7.762,52.426) 9.558,50.63 10.593,51.664 cw(c11.633,50.624) 11.633,52.095 11.633,54.672 ccw(c10.679,54.672) 11.354,55.347 10.026,54.018 cw(c9.982,54.062) 9.982,54 cw(c8.878,54) 9.659,53.22 8.974,52.535 cw(c7.177,54.331) 7.177,51.791 6.452,51.791
RL_HOOTER on Top Layer "NONET_L-01_P-001" (solid, pour order 138): 6.477,52.426 ccw(c6.477,54.817) 8.168,53.126 8.688,53.646 ccw(c7.647,54.686) 9.119,54.686 cw(c9.854,54.686) 9.334,55.207 10.998,56.87 cw(c11.735,56.133) 11.735,57.175 11.735,59.655 ccw(c10.607,59.655) 11.405,60.452 ccw(c11.405,58.919) 10.321,60.003 9.05,58.732 ccw(c10.846,56.936) 8.306,56.936 8.306,56.177 cw(c6.485,56.177) 7.772,54.889 cw(c6.423,56.238) 6.423,54.331 6.401,54.331

## Keep-outs
Keep-Out Layer:
  lines w0.254: 0,0 0,77 82,77 82,0 2,0 0,0 ; 88.563,-0.216 125.563,-0.216 125.563,47 88.563,47 88.563,-0.216
  text "KEEPOUT LAYER" at 90,43 h1.78
  text "PCB INFORMATION:" at 89.677,38.404 h1.78
  text "PCB: FR-4" at 89.677,33.276 h1.78
  text "THICKNESS:35MICRONS" at 89.677,28.149 h1.78
  text "=1 OZ" at 89.677,24.149 h1.78
  text "LAYERS TO PRINT:" at 89.7,20.6 h1.78
  text "TOP LAYER CU" at 97.5,16.9 h1.52
  text "TOP LEGEND" at 97.5,13.9 h1.52
  text "TOP SOLDER" at 97.7,11 h1.52
  text "BOTTOM LEGEND" at 97.9,7.9 h1.52
  text "BOTTOM SOLDER" at 97.7,5 h1.52
  text "BOTTOM LAYER CU" at 97.723,2.019 h1.52
  text "MOUNTING HOLE SIZE IS 2MM" at 15,-6 h1.78

## Other copper
Top Layer:
  rectangle: 0,6 5,14
  rectangle: 0,63 6,72
  rectangle: 76,62 82,72
  rectangle: 76,5 82,14
  text "TOP LAYER CU" at 88.534,75.298 h1.78
  text "SIMCONS CONTROL SYSTEMS" at 25.781,55.575 h2.54
  text "A3 v4.0" at 3.505,25.273 h3.81 r90
Bottom Layer:
  rectangle: 0,5 6,14
  region: 82,14 76,14 76,5 82,5
  region: 82,72 76,72 76,63 82,63
  region: 6.104,71 0,71 0,62.992 6.104,62.992
  text "A3" at 56.702,72.806 h4
  text "rev4" at 49.463,72.704 h4
  text "BOTTOM LAYER CU" at 88.534,69.799 h1.78
  text "SIMCONS" at 80.12,58.06 h1.78 r90

## Silkscreen, mask and mechanical layers (free items; w line width, h text height)
Top Overlay:
  drawing of 1584 lines, arcs and shapes, not listed
  text "C" at 41.329,59.411 h6.35
  text "S" at 35.36,58.014 h8.46
  text "S" at 41.202,58.014 h6.35
  text "SIMCONS" at 32.407,51.75 h2.54
  text "TOP OVERLAY" at 88.3,49.2 h1.78
  text "CONTROL SYSTEMS" at 22.755,47.686 h2.54
  text "A3 rev4" at 3,37 h2.03 r90
  text "S/N:" at 80,15 h5 r90
Bottom Overlay:
  drawing of 1574 lines, arcs and shapes, not listed
  text "BOTTOM LEGEND" at 88.534,64.3 h1.78
  text "A3 rev4" at 80,40 h2.03 r90
  text "S/N:" at 57,1 h2.03
Top Solder:
  the board outline again, w0.254
  text "TOP SOLDER" at 88.534,58.801 h1.78
Bottom Solder:
  rectangle: 14.52,10.905 16.62,13.005
  rectangle: 14.562,16.39 16.662,18.39
  lines w0.254: 0,0 82,0 82,77 0,77 0,0
  text "BOTTOM SOLDER" at 88.534,53.302 h1.78